# Altium PCB 2017_CARTE_4_MOFSET.PCBDOC
Units mil, origin at the board's own origin, x right, y up, seen from the top; angles counter-clockwise.
Board outline 3149.61 x 1181.1 mil, 4 copper layers (1-TOP, 2-SIGNAL, 3-GND, 4-BOTTOM); 34 components, 27 nets, 92 pads, 203 vias.
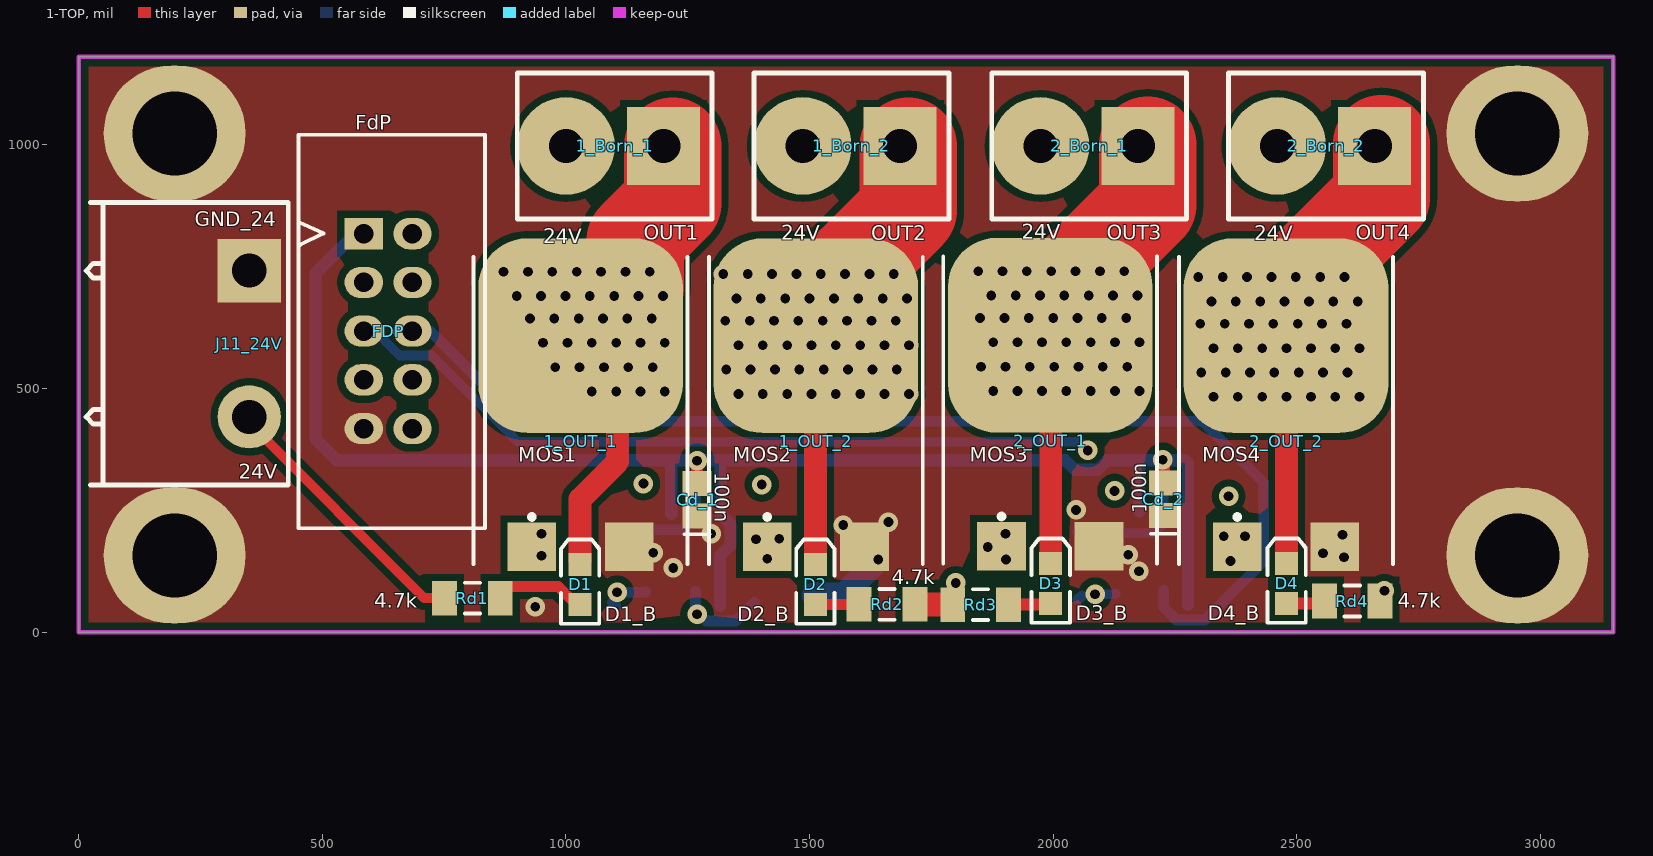
[diagram p0: 1-TOP view]
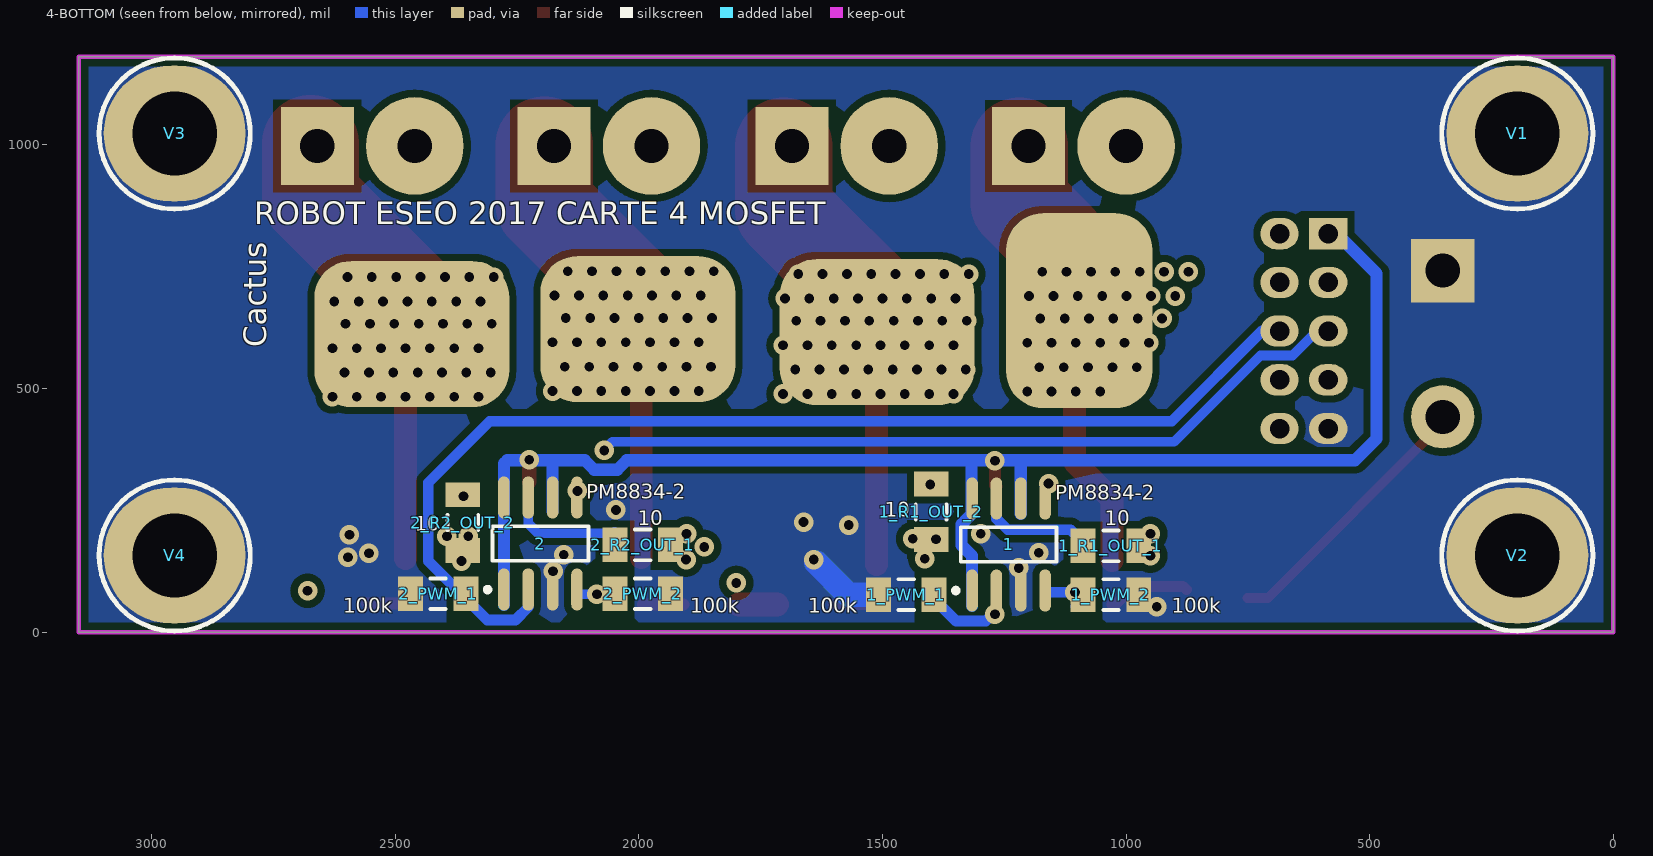
[diagram p1: 4-BOTTOM view, seen from below]
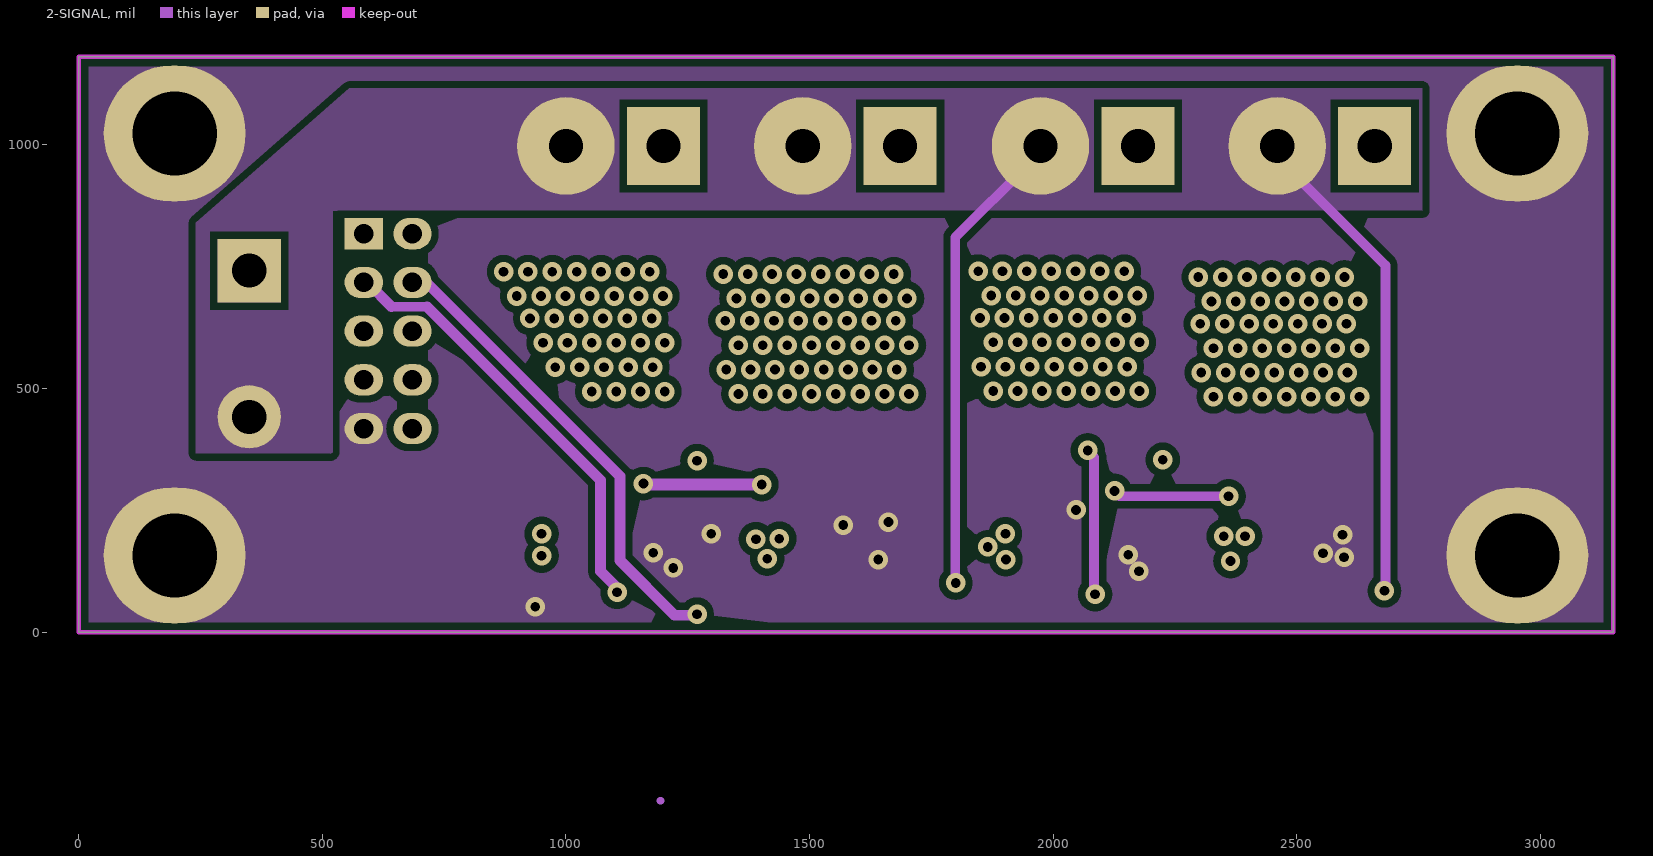
[diagram p2: 2-SIGNAL]
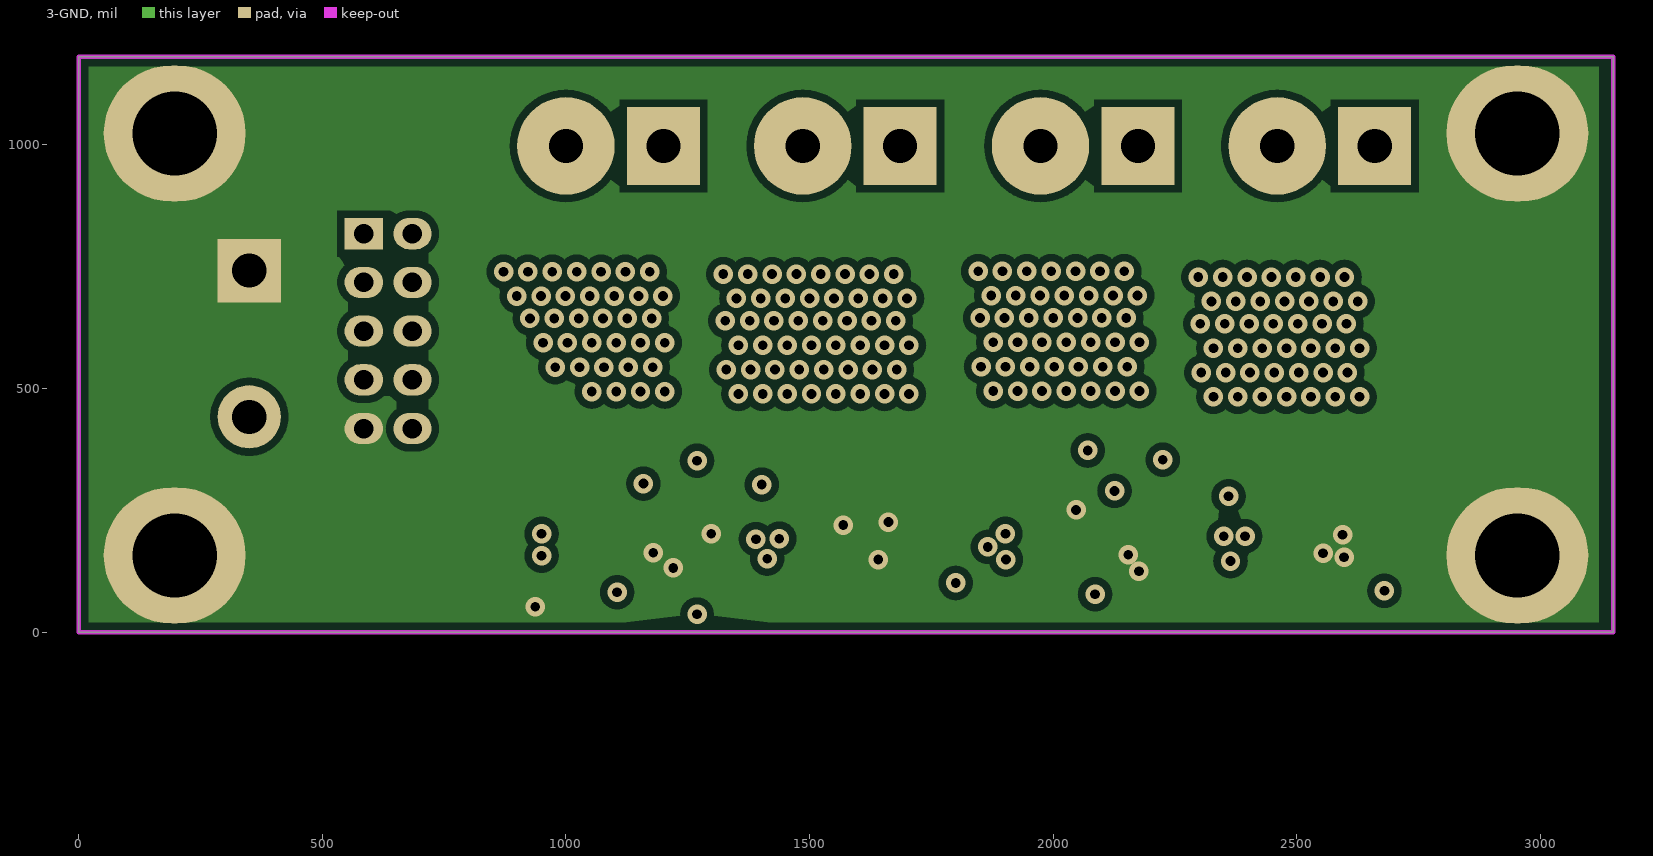
[diagram p3: 3-GND]
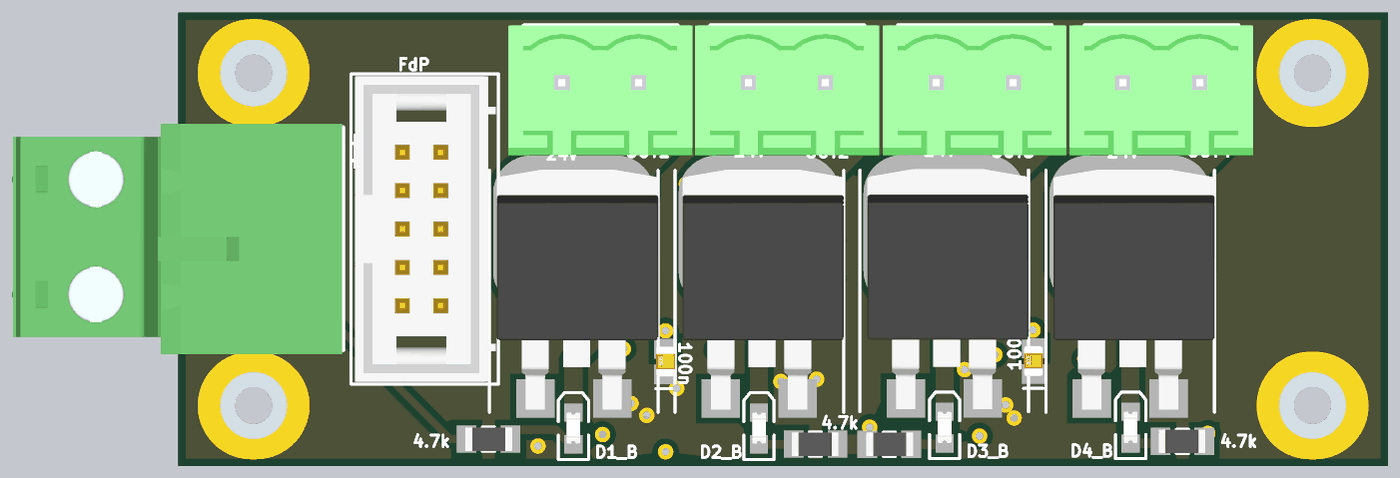
[diagram p4: 3D render of the assembled board from above, using the file's embedded part models]
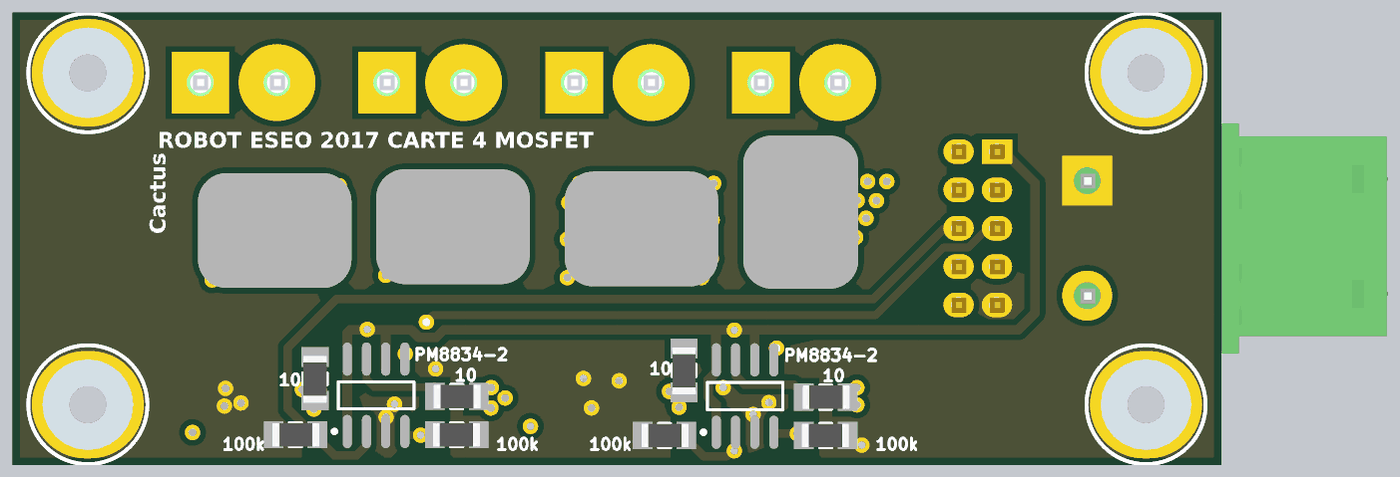
[diagram p5: 3D render of the assembled board from below, using the file's embedded part models]

## Layer stack, top to bottom
Top Solder: solder mask 0.4, Solder Resist, Dk 3.5
1-TOP: signal copper 1.4
Dielectric1: prepreg 12.6, FR-4, Dk 4.8
2-SIGNAL: signal copper 1.4
Dielectric2: core 12.6, FR-4, Dk 4.8
3-GND: signal copper 1.4
Dielectric3: prepreg 12.6, FR-4, Dk 4.8
4-BOTTOM: signal copper 1.4
Bottom Solder: solder mask 0.4, Solder Resist, Dk 3.5

## Board outline
0,0 0,1181.1 3149.61,1181.1 3149.61,0

## Design rules (kind name [scope] priority, off if disabled: settings)
Clearance Clearance_1 [InNamedPolygon('1-GND') Or  InNamedPolygon('3-GND') Or  InNamedPolygon('2-GND') Or  InNamedPolygon('4-GND24') Or InNamedPolygon('3-GND24') Or InNamedPolygon('2-GND24') Or  InNamedPolygon('1-GND24') Or  InNamedPolygon('4-GND') Or InNamedPolygon('2-24V') Or InNamedPolygon('3-GND_')] p1: gap=15
Clearance [All] p2: gap=7
FabricationTestPointUsage TestPointUsage [All] p1: valid=0 allowmultiple=FALSE
FabricationTestpoint Testpoint [All] p1: side=3 testpointundercomponent=TRUE minsize=40 maxsize=100 preferedsize=60 minholesize=0 maxholesize=40 preferedholesize=32 testpointgrid=1 allowsidetop=TRUE allowsidebottom=TRUE usegrid=TRUE gridtolerance=0.01
PlaneClearance [All] p1: clearance=10
PlaneConnect [All] p1: planeconnectstyle=Direct reliefexpansion=25 reliefentries=4 reliefconductorwidth=12 reliefairgap=15
PolygonConnect [All] p1: connectstyle=Direct reliefconductorwidth=10 reliefentries=4 polygonreliefangle="90 Angle" airgapwidth=10
RoomDefinition 2017_CARTE_4_MOFSET [InComponentClass('2017_CARTE_4_MOFSET')] p1: confinementstyle=ConfineIn formatcopy=TRUE lockcomponents=FALSE outline 4678.6,48 5915.6,48 5915.6,428 4678.6,428
RoutingLayers RoutingLayers_1 [All] p1: top layer_v5=TRUE mid layer 1_v5=FALSE mid layer 2_v5=FALSE bottom layer_v5=TRUE
RoutingLayers [All] p2: top layer_v5=TRUE mid layer 1_v5=FALSE mid layer 2_v5=FALSE bottom layer_v5=TRUE
RoutingVias [All] p1: holewidth=28 width=50 viastyle="Through Hole" minholewidth=28 minwidth=50 maxholewidth=28 maxwidth=50
SilkToSolderMaskClearance SilkscreenOverComponentPads [IsPad] p1: minsilkscreentomaskgap=10 clearancetoexposedcopper=TRUE
SolderMaskExpansion [All] p1: expansion=0
Width [All] p1: maxlimit=300 minlimit=8 preferedwidth=20
23 further rules are at their usual default settings.

## Components (designator, comment, footprint, x,y, rotation, side; value= is the part's Value field where it differs from the comment)
1 "PM8834-1" SO8_N 1241,180 r90 bottom
1_Born_1 "BORNIER2" BORNIER2 1000,998 r0 top
1_Born_2 "BORNIER2" BORNIER2 1486,998 r0 top
1_OUT_1 "IRF1018ES" D2PAK_GROS_PAD 1030,392 r0 top
1_OUT_2 "IRF1018ES" D2PAK_GROS_PAD 1513,392 r0 top
1_PWM_1 "100k_1%_75V" R1206_N 1451,77 r180 bottom
1_PWM_2 "100k_1%_75V" R1206_N 1031,77 r0 bottom
1_R1_OUT_1 "10" R1206_N 1031,177 r180 bottom
1_R1_OUT_2 "10" R1206_N 1400,247 r270 bottom
2 "PM8834-2" SO8_N 2202,182 r90 bottom
2_Born_1 "BORNIER2" BORNIER2 1974,998 r0 top
2_Born_2 "BORNIER2" BORNIER2 2460,998 r0 top
2_OUT_1 "IRF1018ES" D2PAK_GROS_PAD 1994,393 r0 top
2_OUT_2 "IRF1018ES" D2PAK_GROS_PAD 2478,392 r0 top
2_PWM_1 "100k_1%_75V" R1206_N 2412,79 r180 bottom
2_PWM_2 "100k_1%_75V" R1206_N 1992,79 r0 bottom
2_R2_OUT_1 "10" R1206_N 1992,179 r180 bottom
2_R2_OUT_2 "10" R1206_N 2361,225 r270 bottom
Cd_1 "100nF" C0805_N 1269,272 r90 top
Cd_2 "100nF" C0805_N 2226,273 r90 top
D1 "LED" LED_0805 1029,98 r90 top
D2 "LED" LED_0805 1512,98 r90 top
D3 "LED" LED_0805 1995,100 r90 top
D4 "LED" LED_0805 2479,100 r90 top
FDP "HE10/10_MALE_DROIT_BAS_PROFIL" HE10/10_M_D_BP 685,818 r270 top
J11_24V "0 - 24V" BORNIER2_FEM_COUDE 350,742 r270 top
Rd1 "4,7k" R1206_N 808,70 r0 top
Rd2 "4,7k" R1206_N 1659,57 r180 top
Rd3 "4,7k" R1206_N 1851,56.69 r0 top
Rd4 "4,7k" R1206_N 2614,64 r180 top
V1 "Entretoise WURTH CMS" ENTRETOISE_CMS 196.85,1023.62 r180 bottom
V2 "Entretoise WURTH CMS" ENTRETOISE_CMS 196.85,157.48 r180 bottom
V3 "Entretoise WURTH CMS" ENTRETOISE_CMS 2952.76,1023.62 r180 bottom
V4 "Entretoise WURTH CMS" ENTRETOISE_CMS 2952.76,157.48 r180 bottom

## Footprints (in the part's own frame and the unit in brackets; to place one, negate y for a bottom-side part, rotate by r counter-clockwise, add the part's x,y. Pads: shape width x height; smd on the part's side, far side on the other; paste and mask are expansions set on the pad)
BORNIER2 [mil] "Connector; Header; 2 Position; screw terminal blocks, Pin Spacing=5.08mm"
  rect 150x160 hole 70: 1(200,0)
  round 200 hole 70: 2(0,0)
  silkscreen extent -100,-150 300,150, body extent -140,-189 338,150, height 472
BORNIER2_FEM_COUDE [mil] "Connector; Header; 2 Position; Right Angle; Female; Pin Spacing=5.08mm Green"
  rect 130x130 hole 70: 1(0,0)
  round 130 hole 70: 2(300,0)
  silkscreen extent -140,-335 440,80, body extent -149,-783 451,77, height 598
C0805_N [mm] "Chip Capacitor, Body 2.0x1.3mm, IPC Medium Density"
  rect 1.3x1.5 smd: 1(-0.85,0) 2(0.85,0)
  silkscreen extent -1.8,-0.65 -1.8,0.65, body extent -0.99,-0.62 1.01,0.63, height 0.8
D2PAK_GROS_PAD [mm] "D2-PAK/TO-263-AB; 3 Leads (1 Cropped); Body 15.5 (inc. leads) x 10.5 mm (LxW max)"
  rect 2.54x2.54 smd: 1(-2.54,-5.5) 3(2.54,-5.5)
  rrect50% 10.668x10.16 smd: 2(0,5.5)
  silkscreen extent -5.58,-6.4 5.58,9.6, body extent -5.08,-6.22 5.59,9.66, height 4.83
ENTRETOISE_CMS [mm] "Entretoise CMS Wurth trou 4.4mm"
  oval 7.4x7.112 hole 4.4: 1(0,0)
  silkscreen extent -3.94,-3.94 3.94,3.94, body extent -2.99,-3 2.99,2.98, height 3
HE10/10_M_D_BP [mm] "HE10 ; 10 CONTACTS ; MALE ;  DROIT; BAS PROFIL ; ESPACEMENTS BROCHES = 2.54 mm"
  rect 1.63x2 hole 1.016: 1(0,-2.54)
  oval 1.63x2 hole 1.016: 2(0,0) 3(2.54,-2.54) 4(2.54,0) 5(5.08,-2.54) 6(5.08,0) 7(7.62,-2.54) 8(7.62,0) 9(10.16,-2.54) 10(10.16,0)
  silkscreen extent -5.16,-5.95 15.36,3.78, body extent -5,-5.8 15.2,3.6, height 8.8
LED_0805 [mm] "SM LED; 2 Flat Leads"
  rect 1.2x1.2 smd: 1(-1.05,0) 2(1.05,0)
  silkscreen extent -2.05,-1 2.35,1, body extent -1.05,-0.64 1.06,0.64, height 1.2
R1206_N [mm] "Chip Resistor, Body 3.2x1.6mm, IPC Medium Density"
  rect 1.3x1.8 smd: 1(-1.45,0) 2(1.45,0)
  silkscreen extent -0.4,-0.8 0.4,0.8, body extent -1.68,-0.87 1.68,0.87, height 0.71
SO8_N [mm] "SOIC, 8-Leads, Body 4.9x3.9mm, Pitch 1.27mm, IPC Medium Density"
  oval 2.2x0.6 smd: 1(-2.4,1.905) 2(-2.4,0.635) 3(-2.4,-0.635) 4(-2.4,-1.905) 5(2.4,-1.905) 6(2.4,-0.635) 7(2.4,0.635) 8(2.4,1.905)
  silkscreen extent -2.52,-2.5 0.9,2.88, body extent -2,-2.5 2,2.5, height 1.75

## Part data
1 2: library part PM8834, "4 A dual low-side MOSFET driver"
1_Born_1 1_Born_2 2_Born_1 2_Born_2: "Terminal blocks, 2 pins, pitch=5mm"
1_OUT_1 1_OUT_2 2_OUT_1 2_OUT_2: library part IRF1010S, "HEXFET N-Channel Power MOSFET"
1_PWM_1 1_PWM_2 1_R1_OUT_1 1_R1_OUT_2 2_PWM_1 2_PWM_2 2_R2_OUT_1 2_R2_OUT_2 Rd1 Rd2 Rd3 Rd4: library part Resistor, "Resistor"
Cd_1 Cd_2: library part Condensateur, "Capacitor"
D1 D2 D3 D4: "Typical LED"
FDP: "EMBASE HE10/10 MALE DROIT BAS PROFIL"
J11_24V: library part BORNIER2, "Terminal blocks, 2 pins, pitch=5mm"
V1 V2 V3 V4: "Entretoise Wurth"

## Free pads (board coordinates)
  rrect50% 300x400 smd far side: 0(1096,660)
  rrect50% 400x300 smd far side: 0(1511,616) 0(2002,622) 0(2466,612)

## Via types
v1: diameter 40, hole 20, 1-TOP to 4-BOTTOM, 203 vias

## Nets (pads, with @x,y where several pads share a name; then routed paths per layer and width w, separated by ;. In a path a pad name is that pad's centre, name@x,y a point inside that pad or via, vN(x,y) a via of type N, cw(c..) or ccw(c..) an arc to the next point about the centre after c; other vN are vias at no path point)
5V: 1.1 1.6 1.8 2.1 2.6 2.8 Cd_1.2 Cd_2.2 FDP.1 | length 3229.7
  1-TOP w25: Cd_1.2@1266,299 1269,302 Cd_1.2 v1(1269,352) ; Cd_2.2@2224,308 Cd_2.2@2225,309
  1-TOP w30: Cd_2.2@2225,309 v1(2225,354)
  4-BOTTOM w22: 1.8@1316,247 1.8
  4-BOTTOM w25: FDP.1@564,814 486,736 486,397 530,353 1216,353 ; 1.6@1216,243 1.6 1216,353 ; 1.1@1316,54 1.1 1316,157 1337.5,178.5 1337.5,221.5 1317,242 1317,353 ; 2.6@2177,248 2.6 2177,348 2172,353 ; 2.1@2277,55.5 2.1 2.8 2277,346 2270,353 2172,353 ; 1216,353 1317,353 ; 1317,353 2025,353 2044.5,333.5 2091.5,333.5 2111,353 2172,353
24V: 1_Born_1.2 1_Born_2.2 2_Born_1.2 2_Born_2.2 J11_24V.2 Rd1.1 Rd2.1 Rd3.1 Rd4.1 | length 2500.4
  1-TOP w20: J11_24V.2@350,429 709,70 Rd1.1
  1-TOP w50: Rd2.1@1717.31,56.69 Rd3.1
  2-SIGNAL w20: v1@1799,100 1799,810 2_Born_1.2@1952,963 ; 2_Born_2.2@2489,946 2682,753 2682,88 v1@2675,95
  other v1: 2680,85 1800,101
GND: 1.3 1_OUT_1.3 1_OUT_2.3 1_PWM_1.1 1_PWM_2.1 2.3 2_OUT_1.3 2_OUT_2.3 2_PWM_1.1 2_PWM_2.1 Cd_1.1 Cd_2.1 FDP.9 J11_24V.1 V1.1 V2.1 V3.1 V4.1 | length 155.3
  4-BOTTOM w50: 1_PWM_1.1 1570,77 v1@1636,143
  other v1: 937,52 2176,125 1220,132 1641,149 2597,154 2154,159 2554,162 1179,163 2594,200 1298,202 1569,220 1662,226 2047,251
MOSFET_1: 1.2 1_PWM_1.2 FDP.4 | length 1169.6
  2-SIGNAL w22: FDP.4@676.06,705.06 688,717 714,717 1111,320 1111,147 1223,35 v1@1272,35
  4-BOTTOM w22: 1.2@1266,84 1266,45 1288,23 1349,23 1_PWM_1.2@1387,61
  other v1: 1269,37
MOSFET_2: 1.4 1_PWM_2.2 FDP.3 | length 965.3
  2-SIGNAL w20: 642,668 715,668
  2-SIGNAL w22: FDP.3@579,718 FDP.3 ; FDP.3@596,714 642,668 ; 715,668 1071,312 1071,125 v1@1113.5,82.5
  4-BOTTOM w22: 1_PWM_2.2@1095,61 1_PWM_2.2@1103,53 ; v1(1105,82) 1163,82 1.4@1164,83
MOSFET_3: 2.2 2_PWM_1.2 FDP.6 | length 2337.7
  4-BOTTOM w22: FDP.6 721,618 906,433 2306,433 2432,307 2432,146 2311,25 2253,25 2227,51 2.2@2227,86
MOSFET_4: 2.4 2_PWM_2.2 FDP.5 | length 1916.6
  2-SIGNAL w20: v1@2073,371 2073,370 2084,359 2084,80 v1(2086,78)
  4-BOTTOM w20: FDP.5@608.3,618 658.3,568 724,568 901,391 2054,391 v1@2071.5,373.5 ; v1(2086,78) 2127,78 2.4@2128,79
  4-BOTTOM w22: 2_PWM_2.2@2051,67 2_PWM_2.2@2059,75
  other v1: 2071,373
MOSFET_5: FDP.8
MOSFET_6: FDP.7
MOSFET_7: FDP.2
MOSFET_8: FDP.10
Net1_5: 1.5 1_R1_OUT_2.1 | length 245.8
  2-SIGNAL w25: v1@1165,303 v1@1401,303
  4-BOTTOM w25: v1(1159,305) 1164,305 1165,304 1165,302 1.5@1164,301
  other v1: 1402,303
Net1_7: 1.7 1_R1_OUT_1.1 | length 227.1
  4-BOTTOM w22: 1_R1_OUT_1.1@1097,193 1114,210 1243,210 1266,233 1.7
Net1_OUT_1_1: 1_OUT_1.1 1_R1_OUT_1.2
  other v1: 950,157 950,202
Net1_OUT_2_1: 1_OUT_2.1 1_R1_OUT_2.2
  other v1: 1413,151 1390,191 1438,192
Net2_5: 2.5 2_R2_OUT_2.1 | length 245.1
  2-SIGNAL w20: v1@2124,291 2136,279 v1@2364,279
  4-BOTTOM w20: 2_R2_OUT_2.1@2358,281 2_R2_OUT_2.1@2358.09,281
  other v1: 2360,279 2126,290
Net2_7: 2.7 2_R2_OUT_1.1 | length 240
  4-BOTTOM w20: 2_R2_OUT_1.1@2050,206 2053,203 2207,203 2227,223 2.7
Net2_OUT_1_1: 2_OUT_1.1 2_R2_OUT_1.2
  other v1: 1903,149 1866,175 1902,202
Net2_OUT_2_1: 2_OUT_2.1 2_R2_OUT_2.2
  other v1: 2364,146 2350,197 2394,197
NetD1_1: D1.1 Rd1.2 | length 171.4
  1-TOP w22: Rd1.2@876,87 883,94 984,94 1021.34,56.66 D1.1
NetD2_1: D2.1 Rd2.2 | length 89.9
  1-TOP w22: D2.1@1512,57 Rd2.2
NetD3_1: D3.1 Rd3.2 | length 83.6
  1-TOP w25: Rd3.2 D3.1@1991.69,56.69
NetD4_1: D4.1 Rd4.2 | length 78.7
  1-TOP w25: D4.1 Rd4.2@2557.66,58.66
OUT1: 1_Born_1.1 1_OUT_1.2 D1.2 pad.0@1096,660 | length 681.8
  1-TOP w47: D1.2@1029,147 1029,273 1106,350 1_OUT_1.2@1106,475
  1-TOP w200: 1_OUT_1.2@1142,707 1142,804 1219,881 1_Born_1.1@1219,997
  other v1: 1053,494 1103,494 1153,494 1203,494 978,544 1028,544 1078,544 1128,544 1178,544 953,594 1003,594 1053,594 1103,594 1153,594 1203,594 926,644 976,644 1026,644 1076,644 1126,644 1176,644 899,690 949,690 999,690 1049,690 1099,690 1149,690 1199,690 872,740 922,740 972,740 1022,740 1072,740 1122,740 1172,740
OUT2: 1_Born_2.1 1_OUT_2.2 D2.2 pad.0@1511,616 | length 825.5
  1-TOP w47: D2.2 1_OUT_2.2@1512,526
  1-TOP w200: 1_OUT_2.2@1486,650 1486,649 1703,866 1_Born_2.1@1703,997
  other v1: 1354,489 1404,489 1454,489 1504,489 1554,489 1604,489 1654,489 1704,489 1329,539 1379,539 1429,539 1479,539 1529,539 1579,539 1629,539 1679,539 1354,589 1404,589 1454,589 1504,589 1554,589 1604,589 1654,589 1704,589 1327,639 1377,639 1427,639 1477,639 1527,639 1577,639 1627,639 1677,639 1350,685 1400,685 1450,685 1500,685 1550,685 1600,685 1650,685 1700,685 1323,735 1373,735 1423,735 1473,735 1523,735 1573,735 1623,735 1673,735
OUT3: 2_Born_1.1 2_OUT_1.2 D3.2 pad.0@2002,622 | length 859.8
  1-TOP w47: D3.2@1995,153.34 2_OUT_1.2@1995,540
  1-TOP w200: 2_OUT_1.2@1974,618 1974,657 2194,877 2_Born_1.1@2194,1000
  other v1: 1877,495 1927,495 1977,495 2027,495 2077,495 2127,495 2177,495 1852,545 1902,545 1952,545 2002,545 2052,545 2102,545 2152,545 1877,595 1927,595 1977,595 2027,595 2077,595 2127,595 2177,595 1850,645 1900,645 1950,645 2000,645 2050,645 2100,645 2150,645 1873,691 1923,691 1973,691 2023,691 2073,691 2123,691 2173,691 1846,741 1896,741 1946,741 1996,741 2046,741 2096,741 2146,741
OUT4: 2_Born_2.1 2_OUT_2.2 D4.2 pad.0@2466,612 | length 898.3
  1-TOP w47: D4.2@2479,151.34 2_OUT_2.2@2479,538
  1-TOP w200: 2_OUT_2.2@2460,580 2460,678 2674,892 2_Born_2.1@2674,1003
  other v1: 2329,483 2379,483 2429,483 2479,483 2529,483 2579,483 2629,483 2304,533 2354,533 2404,533 2454,533 2504,533 2554,533 2604,533 2329,583 2379,583 2429,583 2479,583 2529,583 2579,583 2629,583 2302,633 2352,633 2402,633 2452,633 2502,633 2552,633 2602,633 2325,679 2375,679 2425,679 2475,679 2525,679 2575,679 2625,679 2298,729 2348,729 2398,729 2448,729 2498,729 2548,729 2598,729
copper on no net: | length 0.1
  2-SIGNAL w16: 1193.94,-346.06 1194.08,-346.06

## Polygon pours and split planes (outlines as drawn)
GND on 4-BOTTOM "4-GND" (solid, remove dead copper, pour order 7): 3.37,1186.46 3139.37,1186.46 3142.37,1183.46 3144.37,1181.46 3144.37,14.46 5.37,14.46
GND on 1-TOP "1-GND" (solid, remove dead copper, pour order 8): 5.4,1178.67 3141.4,1178.67 3144.4,1175.67 3146.4,1173.67 3146.4,6.67 7.4,6.67
GND on 2-SIGNAL "2-GND" (solid, remove dead copper, pour order 9): 8,1170 3144,1170 3147,1167 3149,1165 3149,-2 10,-2
24V on 2-SIGNAL "2-24V" (solid, pour order 6): 521,365.91 521,865 2758,865 2758,1116 555,1116 240,840 240,367
GND on 3-GND "3-GND_" (solid, remove dead copper, pour order 10): -20.96,1167.79 3115.04,1167.79 3118.04,1164.79 3120.04,1162.79 3120.04,-4.21 -18.96,-4.21

## Keep-outs
Keep-Out Layer:
  the board outline again, w10

## Silkscreen, mask and mechanical layers (free items; w line width, h text height)
Top Overlay:
  text "FdP" at 567,1031 h30
  text "GND_24" at 238,833 h30
  text "24V" at 1936,808 h30
  text "24V" at 1442,806 h30
  text "OUT4" at 2621,806 h30
  text "OUT1" at 1160,805 h30
  text "OUT3" at 2110,805 h30
  text "OUT2" at 1627,804 h30
  text "24V" at 2413,804 h30
  text "24V" at 953,798 h30
  text "MOS1" at 902,350 h30
  text "MOS2" at 1343,350 h30
  text "MOS3" at 1829,350 h30
  text "MOS4" at 2306,350 h30
  text "100n" at 1305,328 h30 r270
  text "24V" at 328,315 h30
  text "100n" at 2192,244 h30 r90.44
  text "4.7k" at 1669,98 h30
  text "4.7k" at 606,50 h30
  text "4.7k" at 2707,50 h30
  text "D4_B" at 2317,25 h30
  text "D3_B" at 2046,24 h30
  text "D1_B" at 1080,22 h30
  text "D2_B" at 1352,22 h30
Bottom Overlay:
  text "ROBOT ESEO 2017 CARTE 4 MOSFET" at 2789,822 h80
  text "Cactus" at 2749,585 h80 r270
  text "PM8834-2" at 2108,274 h30
  text "PM8834-2" at 1145,272 h30
  text "10" at 1495,237 h30
  text "10" at 2002,220 h30
  text "10" at 1044,219 h30
  text "10" at 2460,208 h30
  text "100k" at 906,40 h30
  text "100k" at 1652,40 h30
  text "100k" at 1894,40 h30
  text "100k" at 2607,40 h30